# Altium PCB brd.PcbDoc
Units mm, origin at the board's own origin, x right, y up, seen from the top; angles counter-clockwise.
Board outline 79 x 50 mm, 2 copper layers (Top Layer, Bottom Layer); 1 components, 6 nets, 16 pads, 0 vias.
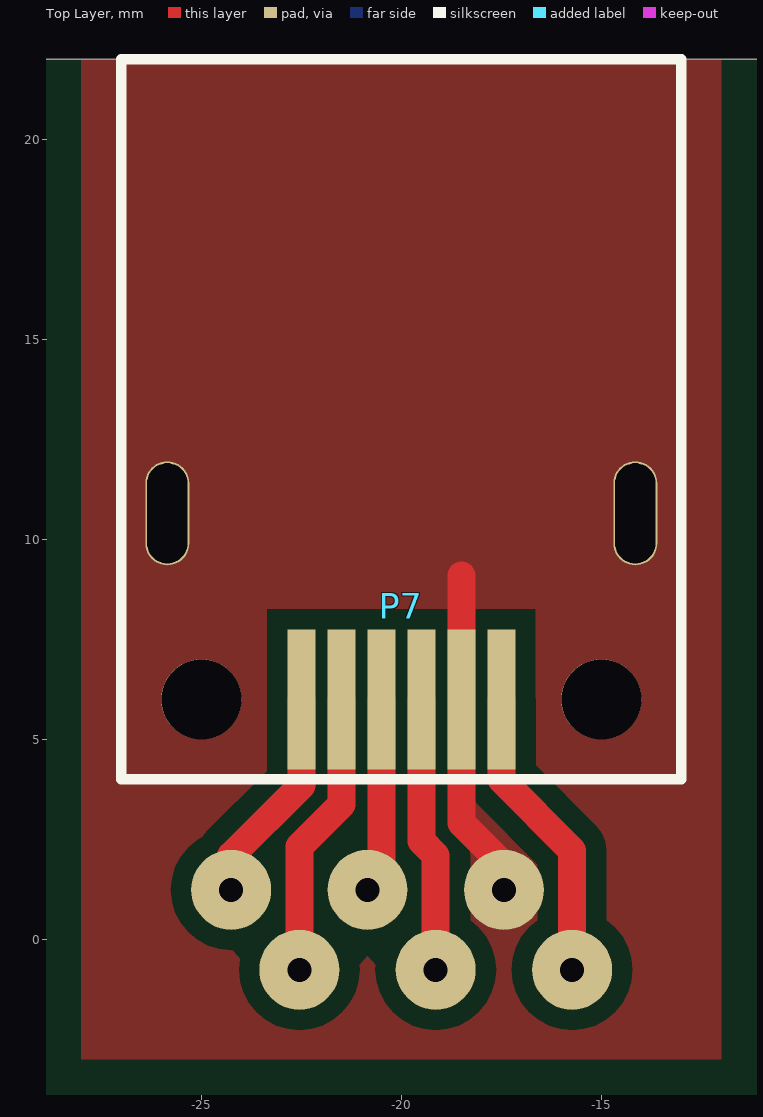
[diagram p0: Top Layer view]
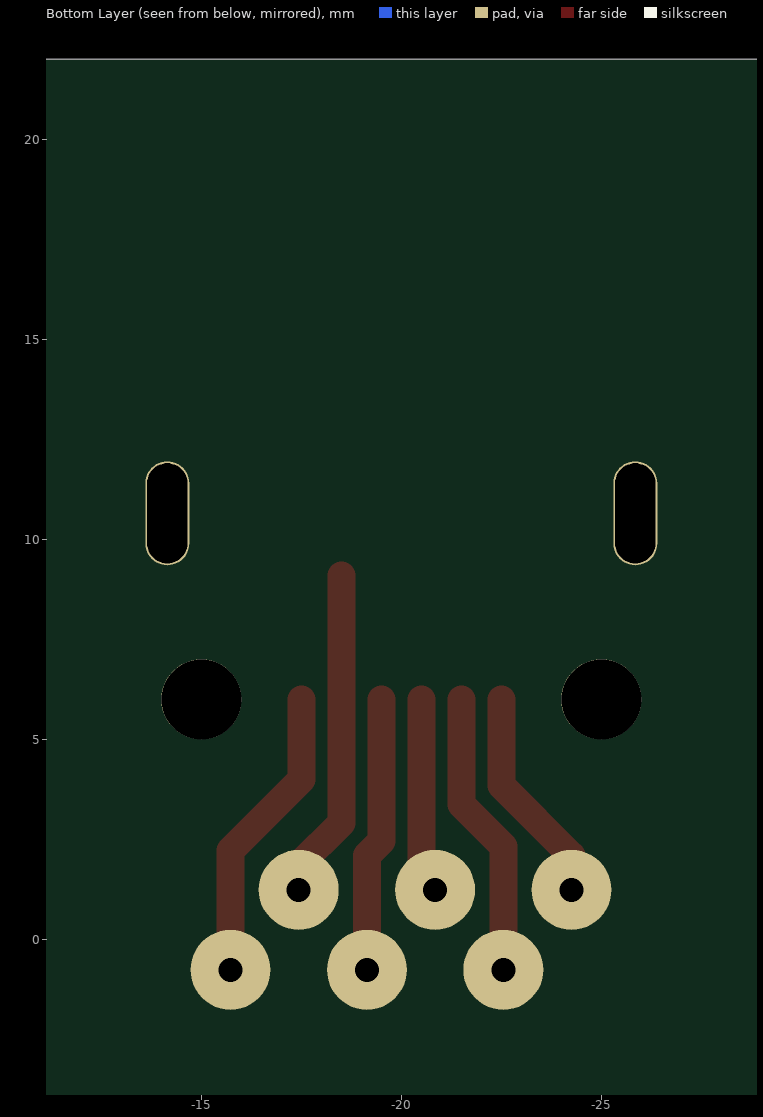
[diagram p1: Bottom Layer view, seen from below]

## Layer stack, top to bottom
Top Solder: solder mask 0.0102, Solder Resist, Dk 3.5
Top Layer: signal copper 0.0356
Dielectric 1: dielectric 0.32, FR-4, Dk 4.8
Bottom Layer: signal copper 0.0356
Bottom Solder: solder mask 0.0102, Solder Resist, Dk 3.5

## Board outline
-39.5,-28 39.5,-28 39.5,22 -39.5,22

## Design rules (kind name [scope] priority, off if disabled: settings)
Clearance [All] p1: gap=0.254 ignorepadtopadclearanceinfootprint=FALSE except(0: Arc-Hole Track-Hole SMDPad-Hole THPad-Hole Via-Hole Fill-Hole Poly-Hole Region-Hole Text-Hole; 0.5: Arc-Fill Arc-Poly Arc-Region Track-Fill Track-Poly Track-Region SMDPad-Fill SMDPad-Poly SMDPad-Region THPad-Fill THPad-Poly THPad-Region Via-Fill Via-Poly Via-Region Fill-Fill Fill-Poly Fill-Region Poly-Poly Poly-Region Region-Region)
ComponentClearance [All] p1 off: gap=0.254 collisioncheckmode=3 verticalgap=0.254 showdistances=FALSE
PolygonConnect [All] p1: connectstyle=Direct reliefconductorwidth=0.254 reliefentries=4 polygonreliefangle="90 Angle" airgapwidth=0.254
RoutingVias [All] p1: holewidth=0.711 width=1.27 viastyle="Through Hole" minholewidth=0.711 minwidth=1.27 maxholewidth=0.711 maxwidth=1.27
SolderMaskExpansion [All] p1: expansion=0.102
Width [All] p1: maxlimit=25.4 minlimit=0.127 preferedwidth=0.254
29 further rules are at their usual default settings.

## Components (designator, comment, footprint, x,y, rotation, side; value= is the part's Value field where it differs from the comment)
P7 "FireWire 356921650" DS1102 -20,6 r180 top

## Footprints (in the part's own frame and the unit in brackets; to place one, negate y for a bottom-side part, rotate by r counter-clockwise, add the part's x,y. Pads: shape width x height; smd on the part's side, far side on the other; paste and mask are expansions set on the pad)
DS1102 [mm]
  rect 0.7x3.5 smd: 1(-2.5,0) 2(-1.5,0) 3(-0.5,0) 4(0.5,0) 5(1.5,0) 6(2.5,0)
  round 2 hole 2: 7(-5,0) 7(5,0)
  oval 1.1x2.6 hole 1 slot 2.5 at 90 deg: 8(-5.85,-4.65) 8(5.85,-4.65)
  silkscreen extent -7,-16 7,2

## Part data
P7: library part "Header 8", "IEEE 1394 (DS1102), SMD розетка на плату (OBSOLETE)", LatestRevisionDate=17-Jul-2002, LatestRevisionNote="Re-released for DXP Platform.", Publisher="Altium Limited"

## Free pads (board coordinates)
  round 2 hole 0.6: 8(-24.254,1.238) 8(-22.549,-0.762) 8(-20.845,1.238) 8(-19.14,-0.762) 8(-17.435,1.238) 8(-15.73,-0.762)

## Nets (pads, with @x,y where several pads share a name; then routed paths per layer and width w, separated by ;. In a path a pad name is that pad's centre, name@x,y a point inside that pad or via, vN(x,y) a via of type N, cw(c..) or ccw(c..) an arc to the next point about the centre after c; other vN are vias at no path point)
_0: P7.1 pad.8@-15.73,-0.762 | length 7.5
  Top Layer w0.7: P7.1 -17.5,3.991 -15.73,2.221 pad.8@-15.73,-0.762
_1: P7.3 pad.8@-19.14,-0.762 | length 6.9
  Top Layer w0.7: P7.3 -19.5,2.453 -19.14,2.092 pad.8@-19.14,-0.762
_2: P7.4 pad.8@-20.845,1.238 | length 4.9
  Top Layer w0.7: pad.8@-20.845,1.238 -20.5,1.583 P7.4
_3: P7.5 pad.8@-22.549,-0.762 | length 7.2
  Top Layer w0.7: pad.8@-22.549,-0.762 -22.549,2.321 -21.5,3.37 P7.5
_4: P7.6 pad.8@-24.254,1.238 | length 5.5
  Top Layer w0.7: pad.8@-24.254,1.238 -24.254,2.089 -22.5,3.844 P7.6
GND: P7.2 P7.7 P7.8 pad.8@-17.435,1.238 | length 8.3
  Top Layer w0.7: -18.5,9.097 P7.2 -18.5,2.908 -17.435,1.843 pad.8@-17.435,1.238

## Polygon pours and split planes (outlines as drawn)
GND on Top Layer "Top Layer-GND" (solid, remove dead copper, pour order 0): -28,-3 -12,-3 -12,22 -28,22